# Altium PCB PCB1.PcbDoc (part 2 of 2)
Units mm, origin at the board's own origin, x right, y up, seen from the top; angles counter-clockwise.
Board outline 100 x 24 mm, 2 copper layers (Top Layer, Bottom Layer); 70 components, 86 nets, 352 pads, 196 vias.
Unrouted connection lines stored in the file: 3.
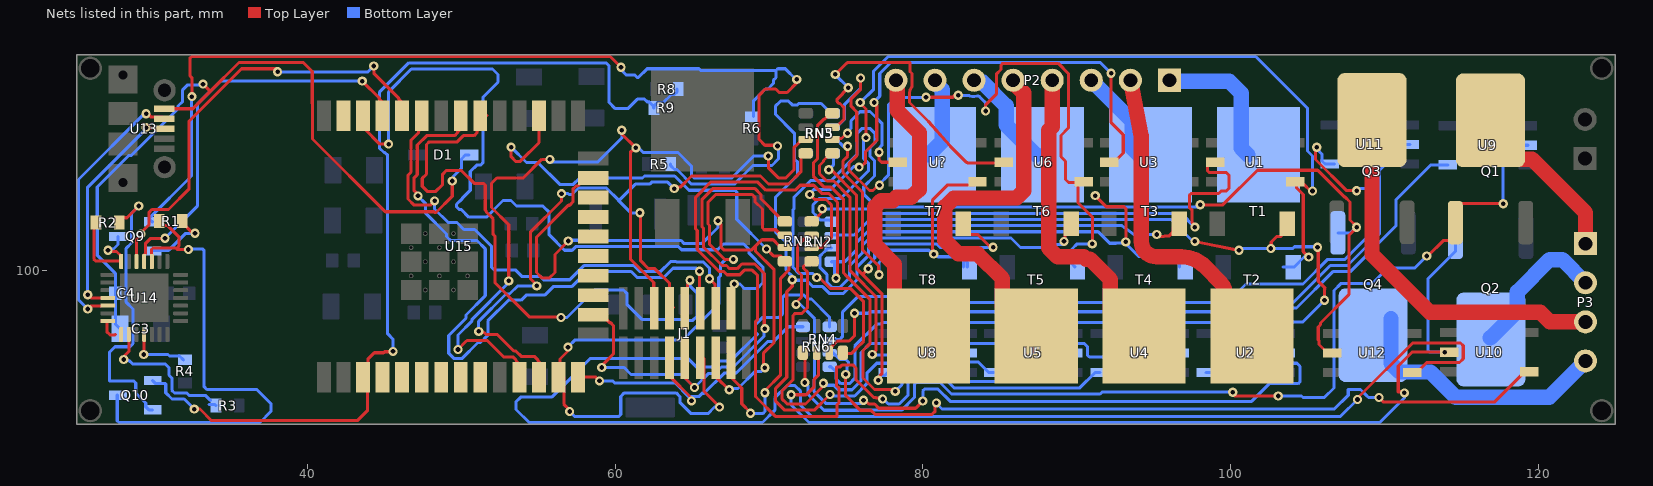
[diagram p2: the nets of this part, all layers, seen from the top]

## Via types
v1: diameter 0.6, hole 0.3, Top Layer to Bottom Layer, 196 vias

## Nets (pads, with @x,y where several pads share a name; then routed paths per layer and width w, separated by ;. In a path a pad name is that pad's centre, name@x,y a point inside that pad or via, vN(x,y) a via of type N, cw(c..) or ccw(c..) an arc to the next point about the centre after c; other vN are vias at no path point) (continued)
NetJ1_06: J1.06 RN3.3 U15.11 | length 57.4
  Top Layer w0.2: v1(49.775,94.85) 50.32,95.395 50.338,95.395 50.367,95.425 51.691,95.425 52.766,94.35 53.369,94.35 53.545,94.174 53.545,94.12 53.915,93.75 U15.11@53.915,92.973 ; v1(53.078,99.305) 53.078,102.957 51.95,104.084 51.95,105.649 52.301,106 54.021,106 55.226,107.205 v1(55.753,107.205) ; v1(60.425,109.1) 60.425,108.86 v1@61.33,107.955 ; v1(61.343,107.955) 61.295,107.955 61.066,107.727 61.003,107.727 61.003,100.694 62.5,99.197 62.5,97.55 J1.06@62.525,97.525 ; v1(69.95,107.425) 69.95,106.66 70.605,106.005 71.102,106.005 71.61,106.513 71.61,107.965 71.885,108.24 71.893,108.24 72.153,108.5 RN3.3@72.375,108.5
  Bottom Layer w0.2: v1(49.775,94.85) 49.775,95.795 50.7,96.72 50.7,96.823 53.078,99.2 v1(53.078,99.305) ; v1(55.753,107.205) 55.753,107.161 55.838,107.075 55.888,107.025 58.85,107.025 60.425,108.6 v1(60.425,109.1) ; v1(61.343,107.955) 61.511,107.955 61.816,107.65 64.074,107.65 64.95,106.774 64.95,106.176 65.126,106 67.574,106 68.999,107.425 v1(69.95,107.425)
NetJ1_07: J1.07 RN6.4 U15.14 | length 20.1
  Top Layer w0.2: 58.025,93.05 58.732,93.05 v1(58.978,92.805) ; J1.07@63.55,94.483 63.55,93.1 64.953,91.697 v1(64.953,91.504)
  Bottom Layer w0.2: v1(58.978,92.805) 59.836,92.805 59.966,92.675 63.882,92.675 64.778,91.78 65.43,91.78 65.653,92.003 65.769,92.003 67.075,93.309 67.848,93.309 69.893,95.355 70.277,95.355 71.247,96.325 RN6.4@72.2,96.325
NetJ1_08: J1.08 RN3.4 U15.12 | length 46.6
  Top Layer w0.2: v1(51.118,96.025) 51.194,95.949 51.477,95.949 51.601,95.825 52.334,95.825 53.409,94.75 53.535,94.75 53.885,94.4 54.739,94.4 54.965,94.174 54.965,94.12 55.26,93.825 U15.12@55.26,93.002 ; v1(54.903,98.98) 54.903,99.041 54.478,99.466 54.478,102.478 56.503,104.503 v1(56.503,104.98) ; v1(61.603,103.73) 61.65,103.683 61.65,100.613 62.158,100.105 62.577,100.105 63.525,99.157 J1.08@63.525,97.525 ; J1.08@63.655,97.692 J1.08@63.775,97.572 ; v1(63.828,105.305) 63.828,105.39 63.818,105.4 64.228,105.4 64.953,106.125 69.437,106.125 69.956,105.605 71.268,105.605 72.065,106.402 72.065,107.365 72.3,107.6 RN3.4@72.375,107.6
  Bottom Layer w0.2: v1(51.118,96.025) 51.118,96.675 52.898,98.455 53.13,98.455 53.655,98.98 v1(54.903,98.98) ; v1(56.503,104.98) 56.932,104.98 56.987,104.925 57.187,104.925 57.612,105.35 59.415,105.35 60.225,104.54 60.225,104.516 ; v1(61.603,103.73) 61.011,103.73 60.225,104.516 ; v1(63.828,105.305) 63.403,105.73 62.367,105.73 62.237,105.6 61.309,105.6 60.225,104.516
NetJ1_09: J1.09 RN1.1 U15.16 | length 37.8
  Top Layer w0.2: U15.16@59.025,97.105 59.125,97.105 59.645,96.585 59.699,96.585 59.875,96.409 59.875,94.55 59.287,93.962 59.287,93.945 59.125,93.783 v1(59.125,93.675) ; J1.09@64.375,94.374 64.375,93.158 v1(65.153,92.38) ; v1(69.728,96.205) 69.683,96.25 69.683,99.789 69.068,100.405 68.227,100.405 67.927,100.105 67.43,100.105 67.23,100.305 66.939,100.305 65.728,101.516 65.728,102.744 65.625,102.847 65.625,104.589 66.361,105.325 69.065,105.325 69.475,104.915 69.475,104.638 70.66,103.453 70.851,103.262 RN1.1@71.025,103.262
  Bottom Layer w0.2: v1(59.125,93.675) 60.575,93.675 61.025,93.225 64.308,93.225 v1(65.153,92.38) 66.074,93.3 66.5,93.3 66.909,93.709 67.682,93.709 69.662,95.688 69.662,96.138 v1(69.728,96.205)
NetJ1_10: J1.10 U15.30 | length 40.4
  Top Layer w0.2: 51.584,103.808 51.597,103.808 52.065,103.34 52.065,102.336 52.175,102.226 52.175,99.206 54.431,96.95 56.45,96.95 v1(56.475,96.925) ; 51.584,103.884 51.55,103.918 51.55,105.533 51.433,105.65 50.825,105.65 50,106.475 49,106.475 48.775,106.25 48.775,105.579 48.301,105.105 47.804,105.105 47.452,105.457 47.452,105.972 47.725,106.245 47.725,108.175 47.9,108.35 49.725,108.35 50.125,108.75 50.829,108.75 51.005,108.926 51.005,109.033 51.275,109.303 51.275,109.75 51.575,110.05 51.675,110.05 ; J1.10@64.575,97.797 64.699,97.921 64.699,99.091 64.85,99.242 v1(64.85,99.35)
  Bottom Layer w0.2: v1(56.475,96.925) 56.858,96.925 58.653,98.72 60.533,98.72 60.75,98.503 60.75,97.787 61.727,96.81 64.29,96.81 64.356,96.744 65.047,96.744 65.33,97.027 65.33,98.503 64.85,98.983 v1(64.85,99.35)
NetJ1_11: J1.11 RN1.2 U15.13 | length 47.1
  Top Layer w0.2: U15.13@56.305,93.05 56.408,93.153 56.408,94.233 56.925,94.75 v1(56.925,95.005) ; U15.13@56.5,93.153 56.655,92.998 56.655,91.291 57.031,90.915 v1(57.031,90.819) ; J1.11@65.725,94.282 65.778,94.229 65.778,92.122 66.778,91.122 v1(66.778,91.104) ; v1(67.678,100.705) 67.105,100.705 66.128,101.682 66.128,102.91 66.025,103.013 66.025,104.424 66.526,104.925 68.899,104.925 69.075,104.749 69.075,104.473 69.57,103.978 69.57,102.747 69.687,102.63 70.434,102.63 70.789,102.275 RN1.2@71.025,102.275
  Bottom Layer w0.2: v1(56.925,95.005) 57.395,95.475 64.4,95.475 65.35,96.425 65.35,96.474 65.526,96.65 65.575,96.65 66.728,97.803 66.728,99.519 66.833,99.624 66.833,100.358 67.18,100.705 v1(67.678,100.705) ; v1(57.031,90.819) 57.35,90.5 60.238,90.5 60.355,90.617 60.355,91.797 60.588,92.03 63.962,92.03 64.195,91.797 64.195,91.414 64.933,90.676 66.024,90.676 66.452,91.104 v1(66.778,91.104)
NetJ1_12: J1.12 U15.31 | length 44.2
  Top Layer w0.2: v1(47.177,104.83) 47.223,104.83 47.243,104.85 46.927,105.166 46.927,106.013 47.125,106.211 47.125,108.141 47.734,108.75 49.559,108.75 49.735,108.926 49.735,108.98 50.105,109.35 U15.31@50.105,110.017 ; J1.12@65.435,97.948 J1.12@65.435,98.09 ; v1(65.478,99.93) 65.475,99.927 65.475,98.09 65.475,97.575 J1.12@65.525,97.525
  Bottom Layer w0.2: v1(47.177,104.83) 47.65,104.357 47.65,103.734 49.032,102.351 49.032,102.199 49.296,101.935 51.009,101.935 51.55,101.394 51.55,98.346 50.3,97.096 50.3,96.886 49.175,95.761 49.175,94.601 49.526,94.25 50.024,94.25 51.074,95.3 51.241,95.3 51.718,95.777 51.718,96.709 53.063,98.055 53.879,98.055 54.204,98.38 55.41,98.38 55.96,98.93 57.166,98.93 58.156,99.92 61.03,99.92 61.421,99.53 63.155,99.53 63.755,100.13 65.278,100.13 v1(65.478,99.93)
NetJ1_13: J1.13 RN1.3 U15.23 | length 43.2
  Top Layer w0.2: v1(56.95,101.9) 56.078,101.028 56.078,99.856 55.726,99.505 55.229,99.505 54.878,99.856 54.878,102.151 56.951,104.225 57.033,104.225 57.242,104.434 57.242,105.266 57.451,105.475 57.558,105.475 57.675,105.592 57.675,105.645 U15.23@58.675,105.645 ; J1.13@66.575,94.27 66.575,93.053 67.396,92.232 v1(67.412,92.232) ; v1(66.675,103.212) 66.675,103.2 66.875,103 66.875,101.501 67.051,101.325 68.878,101.325 69.103,101.55 ; v1(69.728,93.668) 69.625,93.771 69.625,94.596 70.328,95.3 70.328,100.031 69.103,101.256 69.103,101.55 ; RN1.3@71.025,101.475 70.897,101.603 70.638,101.603 70.261,101.98 69.533,101.98 69.103,101.55
  Bottom Layer w0.2: v1(56.95,101.9) 57,101.95 57.934,101.95 57.954,101.93 64.28,101.93 64.48,101.73 65.629,101.73 66.675,102.776 v1(66.675,103.212) ; v1(67.412,92.232) 67.493,92.313 67.983,92.313 69.1,93.429 69.49,93.429 v1(69.728,93.668)
NetJ1_14: J1.14 U15.33 | length 32.7
  Top Layer w0.2: U15.33@47.715,110.05 47.715,109.5 47.365,109.15 47.312,109.15 47.195,109.033 47.195,108.926 46.725,108.456 46.725,106.376 46.527,106.179 46.527,104.632 46.929,104.23 47.977,104.23 v1(48.252,104.505) ; v1(66.128,99.449) 66.475,99.102 J1.14@66.475,97.653
  Bottom Layer w0.2: v1(48.252,104.505) 48.252,103.985 48.25,103.982 49.135,103.098 49.706,103.098 50.154,102.65 50.859,102.65 51.95,101.559 51.95,100.192 52.117,100.025 53.5,100.025 53.945,99.58 55.151,99.58 55.351,99.38 57.05,99.38 57.991,100.32 61.196,100.32 61.586,99.93 62.967,99.93 63.553,100.516 63.609,100.572 63.941,100.572 63.983,100.53 65.727,100.53 66.128,100.128 v1(66.128,99.449)
NetJ1_15: J1.15 RN1.4 U15.27 | length 42.8
  Top Layer w0.2: v1(53.228,108.005) 53.228,107.372 53.517,107.083 53.831,107.083 55.043,108.294 55.043,109.608 U15.27@55.242,109.808 ; J1.15@67.575,94.423 67.575,93 68.225,92.35 68.225,91.319 68.795,90.749 v1(68.795,90.7) ; v1(69.728,92.029) 69.728,92.184 70.75,93.206 70.75,99.475 71.3,100.025 71.3,100.371 70.736,100.935 70.273,100.935 v1(69.828,101.38)
  Bottom Layer w0.2: v1(53.228,108.005) 54.233,107 54.965,107 56.385,105.58 57.276,105.58 57.696,106 61.766,106 61.896,106.13 63.864,106.13 64.794,105.2 67.783,105.2 67.9,105.083 67.9,103.308 v1(69.828,101.38) ; v1(68.795,90.7) 69.611,90.7 69.728,90.817 v1(69.728,92.029)
NetJ1_16: J1.16 U15.36 | length 52.6
  Top Layer w0.2: U15.36@43.675,109.976 43.675,109.217 44.692,108.2 v1(45.264,108.2) ; J1.16@67.55,97.544 67.652,97.646 67.652,99.028 v1(67.728,99.105)
  Bottom Layer w0.2: v1(45.264,108.2) 45.264,111.6 46.745,113.08 52.015,113.08 52.372,112.724 52.372,112.226 51.41,111.264 51.41,107.011 51.234,106.835 50.986,106.835 50.575,106.424 50.575,105.2 50.05,104.675 50.05,104.65 49.683,104.283 49.683,104.118 49.851,103.95 49.985,103.95 50.485,103.45 51.624,103.45 52.704,104.53 53.221,104.53 53.576,104.175 55.29,104.175 55.7,103.765 55.7,102.302 56.701,101.3 57.199,101.3 57.428,101.53 64.114,101.53 64.314,101.33 66.649,101.33 67.023,101.705 68.343,101.705 68.7,101.347 68.7,101.094 69.598,100.196 69.598,99.201 69.202,98.805 68.405,98.805 68.105,99.105 v1(67.728,99.105)
NetP2_1: P2.1 T1.4 | length 9.2
  Bottom Layer w1: P2.1@96.025,112.35 96.1,112.275 99.925,112.275 100.686,111.514 100.686,107.944 T1.4@101.13,107.5
NetP2_2: P2.2 T2.4 | length 22.6
  Top Layer w1: P2.2@93.485,112.35 94.181,108.783 94.181,108.78 cw(c93.199,108.594) 94.191,108.716 ; 94.191,108.716 94.192,108.71 cw(c93.2,108.585) 94.2,108.585 94.2,101.875 ccw(c95.2,101.875) 95.2,100.875 96.78,100.875 cw(c96.78,98.675) 98.102,100.434 98.218,100.346 cw(c97.08,98.825) 98.457,100.134 99.348,99.198 cw(c98.625,98.508) 99.625,98.512 99.625,98.511 99.625,95.525 T2.4@101.05,94.1
NetP2_3: P2.3 T3.4 | length 6.1
  Bottom Layer w1: P2.3@90.945,112.35 93.6,109.695 93.6,107.933 T3.4@94.033,107.5
NetP2_4: P2.4 T4.4 | length 20.5
  Top Layer w1: P2.4@88.405,112.35 88.405,109.326 88.175,109.096 88.175,101.461 88.761,100.875 90.466,100.875 90.616,100.725 90.854,100.725 92.18,99.399 92.18,97.278 T4.4@93.983,95.475
NetP2_5: P2.5 T5.4 | length 24.4
  Top Layer w1: P2.5@85.865,112.35 85.865,112.215 86.55,111.53 86.55,105.16 86.09,104.7 82.015,104.7 81.43,104.115 81.43,101.935 82.304,101.061 83.561,101.061 85.167,99.455 85.167,97.675 T5.4@87.067,95.775
NetP2_6: P2.6 T6.4 | length 6.8
  Bottom Layer w1: P2.6@83.325,112.35 83.421,112.254 83.846,112.254 85.417,110.683 85.417,109.45 T6.4@87.367,107.5
NetP2_7: P2.7 T7.4 | length 5.4
  Bottom Layer w1: T7.4@80.35,107.5 81.267,108.417 81.267,111.733 80.785,112.215 P2.7@80.785,112.35
NetP2_8: P2.8 T8.4 | length 21
  Top Layer w1: P2.8@78.245,112.35 78.325,112.27 78.325,110.387 79.775,108.937 79.775,105.225 79.715,105.225 79.24,104.75 78.275,104.75 78.05,104.525 77.28,104.525 76.87,104.115 76.87,101.66 78.15,100.38 78.15,97.225 T8.4@79.9,95.475
NetP3_1: P3.1 Q1.3 | length 11.2
  Top Layer w1: Q1.3@116.9,109.775 116.9,108.97 118.645,107.225 119.597,107.225 123.075,103.747 P3.1@123.075,101.725
NetP3_2: P3.2 Q2.3 | length 9.6
  Bottom Layer w1: Q2.3@116.89,95.6 118.645,97.355 118.645,98.595 120.741,100.691 121.569,100.691 P3.2@123.075,99.185
NetP3_3: P3.3 Q3.3 | length 24.4
  Top Layer w1: Q3.3@109.194,109.762 109.194,101.019 112.937,97.275 120.126,97.275 120.756,96.645 P3.3@123.075,96.645
NetP3_4: P3.4 Q4.3 | length 17.4
  Bottom Layer w1: Q4.3@110.434,96.841 110.434,93.944 110.995,93.383 112.995,93.383 114.628,91.75 120.72,91.75 P3.4@123.075,94.105
NetQ1_1: Q1.1 RN4.1 U9.5 | length 64.8
  Top Layer w0.2: RN4.1@72.325,94.685 72.325,92.708 v1(72.329,92.705) ; v1(100.15,92.075) 100.15,91.942 100.267,91.825 v1(103.1,91.825) ; v1(112.75,100.925) 112.825,100.925 113.825,101.925 114.236,101.925 114.61,102.299 114.61,103.125 114.61,103.978 114.957,104.325 v1(117.725,104.325)
  Bottom Layer w0.2: v1(72.329,92.705) 72.529,92.504 72.529,91.939 73.567,90.9 75.8,90.9 ; 75.8,90.904 78.618,90.904 79.44,91.726 79.44,92.583 79.557,92.7 81.115,92.7 81.859,91.955 83.12,91.955 91.521,91.955 91.641,92.075 v1(100.15,92.075) ; v1(103.1,91.825) 104.604,91.825 104.704,91.725 106.1,91.725 106.72,92.345 106.72,98.686 107.159,99.125 109.2,99.125 110.225,100.15 111.975,100.15 v1(112.75,100.925) ; v1(117.725,104.325) 117.725,106.825 119.025,108.125 U9.5@119.325,108.125
NetQ2_1: Q2.1 RN4.2 U10.5 | length 61
  Top Layer w0.2: v1(71.428,91.904) 72.348,91.904 72.373,91.879 72.929,92.435 72.929,92.903 73.225,93.199 RN4.2@73.225,94.51 ; v1(111.3,92.025) 111.225,92.1 110.9,92.1 110.9,93.774 111.801,94.675 v1(113.925,94.675) U10.5@114.225,94.675
  Bottom Layer w0.2: v1(71.428,91.904) 71.428,91.265 72.594,90.1 73.013,90.1 73.922,90.1 74.725,90.1 105.941,90.1 109.7,90.1 111.3,91.7 v1(111.3,92.025) ; v1(113.925,94.675) 112.942,94.675 112.825,94.792 112.825,99.435 114.61,101.22 Q2.1@114.61,102.15
NetQ3_3: RN4.3 U11.5 | length 46.4
  Top Layer w0.2: RN4.3@74.084,94.967 74.084,95.049 74.435,95.4 75.205,95.4 75.565,95.76 75.565,97.187 v1(75.55,97.202)
  Bottom Layer w0.2: v1(75.55,97.202) 76.452,97.202 76.55,97.3 101.599,97.3 102.244,97.945 104.12,97.945 106.485,100.31 107.608,100.31 109.691,102.394 109.691,106.517 111.35,108.175 U11.5@111.65,108.175
NetQ4_1: Q4.1 RN4.4 U12.5 | length 73.6
  Top Layer w0.2: v1(73.104,99.53) 73.256,99.53 73.961,98.825 75.275,98.825 76.15,97.95 76.15,95.39 75.704,94.944 75.704,94.938 75.366,94.6 75.015,94.6 RN4.4@74.925,94.51 ; v1(98.025,104.25) 99.5,104.25 101.75,106.5 105.659,106.5 107.384,104.775 107.423,104.775 107.76,104.439 107.76,103.265 108.142,102.883 108.142,102.852 v1(108.194,102.8) ; U12.5@106.6,94.62 106.3,94.62 105.75,95.17 105.75,95.416 105.7,95.466 105.7,96.314 105.85,96.464 105.85,96.575 107.689,98.414 107.689,102.264 v1@108.209,102.784
  Bottom Layer w0.2: v1(73.104,99.53) 72.854,99.78 71.965,99.78 71.56,100.185 71.56,103.936 71.629,104.005 71.629,104.757 72.696,105.825 74.022,105.825 75.704,107.507 75.704,108.373 75.7,108.376 75.7,108.874 76.051,109.225 76.549,109.225 76.9,108.874 76.9,108.3 76.55,107.95 76.55,107.423 76.854,107.119 76.854,106.129 76.154,105.429 76.154,104.932 76.985,104.1 97.875,104.1 v1(98.025,104.25) ; Q4.1@106.975,102.425 107.76,102.425 108.135,102.8 v1(108.194,102.8)
NetQ9_1: Q9.1 R5.1 R6.2 | length 73.1
  Top Layer w0.2: v1(32.475,111.289) 32.475,112.524 32.342,112.657 32.342,113.783 32.459,113.9 59.675,113.9 v1(60.375,113.2) ; v1(70.55,108.077) 70.5,108.127 69.725,108.127 69.353,108.498 69.353,111.379 69.755,111.78 70.427,111.78 70.657,111.55 71.174,111.55 71.804,112.18 v1(71.804,112.405)
  Bottom Layer w0.2: Q9.1@29.925,103.15 29.875,103.15 29.675,103.35 32.45,106.125 32.45,111.125 32.475,111.15 v1(32.475,111.289) ; v1(60.375,113.2) 60.375,113.092 60.512,112.955 60.512,112.888 60.7,112.7 61.25,112.7 61.425,112.525 61.499,112.525 62.074,113.1 65.441,113.1 65.558,112.983 70.45,112.983 ; R5.1@63.6,106.9 63.6,106.8 63.85,106.55 64.01,106.55 64.96,105.6 67.74,105.6 68.953,106.813 70.187,106.813 70.603,107.23 70.603,108.024 v1(70.55,108.077) ; R6.2@69,110 69,111.026 69.757,111.783 69.924,111.783 70.275,112.134 70.275,112.349 70.45,112.524 70.45,112.983 ; v1(71.804,112.405) 71.754,112.405 71.059,113.1 70.567,113.1 70.45,112.983
NetQ9_2: Q9.2 R1.2 | length 4.4
  Top Layer w0.2: R1.2@31.85,103.2 31.85,103.1 32.473,102.477 32.598,102.477 v1(32.675,102.4)
  Bottom Layer w0.2: Q9.2@29.925,101.25 29.975,101.3 30.963,101.3 32.038,102.375 32.65,102.375 v1(32.675,102.4)
NetQ9_3: Q9.3 R2.1 U14.28 | length 7
  Top Layer w0.2: R2.1@26.25,103.1 26.1,102.95 26.1,100.717 26.217,100.6 27.845,100.6 U14.28@27.875,100.57 27.875,100.925 27.577,101.223 27.102,101.223 v1(27.025,101.3)
  Bottom Layer w0.2: v1(27.025,101.3) 27.102,101.377 27.377,101.377 27.675,101.675 Q9.3@27.675,102.2
NetQ10_1: Q10.1 R8.1 R9.2 U15.3 | length 62
  Top Layer w0.2: v1(32.625,90.975) 33,90.975 33.75,90.225 43.234,90.225 43.905,90.896 U15.3@43.905,93.05 ; U15.3@43.605,93.05 43.915,93.36 43.915,94.215 44.337,94.637 44.942,94.637 45.004,94.699 45.524,94.699 v1(45.55,94.725)
  Bottom Layer w0.2: Q10.1@29.925,92.825 30.125,92.625 30.75,92.625 30.775,92.6 30.775,92.035 31.185,91.625 31.975,91.625 v1(32.625,90.975) ; v1(45.55,94.725) 45.55,95.52 45.2,95.87 45.2,107.474 45.024,107.65 44.966,107.65 44.664,107.951 44.664,111.566 46.579,113.48 59.394,113.48 59.6,113.274 59.6,110.91 60.004,110.505 60.821,110.505 61.437,111.121 61.899,111.121 62.07,110.95 62.169,110.95 62.185,110.965 62.5,110.65 R9.2@62.5,110.55 ; R9.2@62.569,110.719 62.75,110.9 63.125,110.9 63.65,111.425 63.85,111.425 64,111.575 R8.1@64,111.775
NetQ10_2: Q10.2 R2.2 | length 19
  Top Layer w0.2: R2.2@27.75,103.1 27.75,103.162 28,103.412 28.262,103.412 v1(29.025,104.175)
  Bottom Layer w0.2: v1(29.025,104.175) 28.55,103.7 28.55,101.776 28.2,101.426 28.2,97.926 28.65,97.476 28.65,95.226 28.449,95.025 27.476,95.025 27.125,94.674 27.125,92.801 28.049,92.801 28.699,92.801 28.825,92.675 28.825,92.025 29.475,91.375 29.475,91.125 29.675,90.925 Q10.2@29.925,90.925
NetQ10_3: Q10.3 R1.1 U14.24 | length 32.5
  Top Layer w0.2: U14.24@29.85,101.05 29.85,101.355 29.945,101.45 31.508,101.45 31.625,101.567 31.625,102.175 30.883,102.917 30.6,102.917 30.35,103.167 R1.1@30.35,103.2 ; 31.508,101.355 32.22,101.355 32.225,101.35 v1(32.25,101.35)
  Bottom Layer w0.2: Q10.3@27.625,91.9 27.625,90.217 27.742,90.1 36.899,90.1 37.625,90.826 37.625,91.324 36.699,92.25 33.451,92.25 33.275,92.426 33.275,101.275 33.158,101.392 32.292,101.392 v1(32.25,101.35)
NetR3_1: R3.1 U14.9 | length 9.7
  Top Layer w0.2: v1(28.05,94.2) 28.05,94.392 28.375,94.717 U14.9@28.375,95.83
  Bottom Layer w0.2: v1(28.05,94.2) 28.127,94.123 28.401,94.123 28.624,93.9 30.75,93.9 30.988,93.662 30.988,93.178 31.175,92.991 31.175,92.201 31.351,92.025 32.141,92.025 32.316,91.85 33.375,91.85 33.675,91.55 ; 33.6,91.275 33.975,91.275 R3.1@34.05,91.2
NetR4_2: R4.2 U14.11 | length 4
  Top Layer w0.2: v1(29.35,94.525) 29.375,94.55 U14.11@29.375,95.83
  Bottom Layer w0.2: v1(29.35,94.525) 30.916,94.525 31.016,94.425 31.675,94.425 R4.2@31.925,94.175
NetRN1_5: RN1.5 U4.5 | length 40
  Top Layer w0.2: RN1.5@72.765,100.575 72.602,100.575 72.402,100.375 72.367,100.375 72.25,100.258 72.25,100.114 72.503,99.861 72.503,97.578 72.105,97.18 71.667,97.18 71.55,97.063 71.55,92.875 70.828,92.153 70.828,91.656 71.18,91.304 72.364,91.304 73.529,92.469 v1(73.529,92.655)
  Bottom Layer w0.2: v1(73.529,92.655) 73.658,92.525 74.205,92.525 74.5,92.23 75.393,92.23 75.979,92.815 75.979,94.653 76.551,95.225 83.639,95.225 90.499,95.225 90.7,95.024 90.7,94.475 90.82,94.355 U4.5@96.52,94.355
NetRN1_6: RN1.6 U3.5 | length 38.4
  Top Layer w0.2: v1(72.645,104.925) 72.967,104.602 73.699,104.602 74.051,104.251 74.051,102.117 73.425,101.491 72.816,101.491 RN1.6@72.8,101.475 ; v1@75.929,106.78 76.043,106.78 76.257,106.993 76.257,107.682 77.017,108.442 77.017,108.608 77,108.625 77,110.734 v1(76.829,110.905) ; U3.5@92.125,107.02 92.425,107.02 93.025,107.62 93.025,108.806 92.235,109.597 v1(92.235,112.805) v1@92.23,112.8
  Bottom Layer w0.2: v1(72.645,104.925) 72.645,104.966 72.934,105.255 74.018,105.255 75.52,106.757 75.802,106.757 v1(75.854,106.705) ; v1(76.829,110.905) 76.829,110.954 77.195,111.32 77.195,112.785 77.91,113.5 91.53,113.5 92.225,112.805 v1(92.235,112.805)
NetRN1_7: RN1.7 U2.5 | length 48.2
  Top Layer w0.2: v1(71.754,97.78) 71.754,97.895 71.75,97.899 72.103,98.252 72.103,99.695 71.85,99.949 71.85,101.619 72.246,102.015 72.269,102.015 72.429,102.175 RN1.7@72.675,102.175 ; v1(76.14,91.541) 76.248,91.541 76.489,91.3 76.86,91.3 77.13,91.029 79.525,91.029 v1(79.996,91.5)
  Bottom Layer w0.2: v1(71.754,97.78) 71.788,97.78 71.907,97.898 72.965,96.84 72.965,92.939 72.929,92.903 72.929,92.104 73.708,91.325 75.924,91.325 v1(76.14,91.541) ; v1(79.996,91.5) 79.996,92.158 80.113,92.275 80.974,92.275 81.774,91.475 101.375,91.475 102.525,92.625 104.398,92.625 104.515,92.742 104.515,93.754 104.314,93.955 103.707,93.955 103.59,94.072 U2.5@103.59,94.625
NetRN1_8: RN1.8 U1.5 | length 33.5
  Top Layer w0.2: RN1.8@72.879,103.201 72.88,103.201 73.374,103.695 73.374,103.926 v1(73.451,104.002) ; v1(97.68,102.805) 97.68,102.913 97.501,103.092 97.501,103.908 97.325,104.084 97.325,104.868 97.442,104.985 99.224,104.985 99.389,105.15 99.724,105.15 99.9,105.326 99.9,106.174 99.724,106.35 98.617,106.35 98.5,106.467 U1.5@98.5,106.855
  Bottom Layer w0.2: v1(73.451,104.002) 73.478,103.975 76.519,103.975 76.794,103.7 96.785,103.7 v1(97.68,102.805)
NetRN2_1: RN2.1 T1.1 U1.1 | length 57.8
  Top Layer w0.2: v1(75.932,110.905) 75.932,110.851 76.3,110.482 v1(76.3,108.625) ; U1.1@104.2,105.75 104.2,105.585 104.765,105.585 105.2,105.15 v1(105.325,105.15) ; U1.1@104.24,105.585 104.275,105.55 104.275,105.375 104.725,104.925 104.725,101.21 v1(105.08,100.855)
  Bottom Layer w0.2: RN2.1@74.065,103.15 73.94,103.275 73.3,103.275 73.1,103.475 73.1,103.505 72.851,103.754 72.851,104.251 73.25,104.65 74.647,104.65 76.454,106.457 76.454,106.954 76.15,107.257 76.15,108.475 v1(76.3,108.625) 76.3,108.668 v1@76.329,108.697 ; v1(75.932,110.905) 76.795,111.769 76.795,112.951 77.744,113.9 100.954,113.9 101.629,113.9 105,110.529 105,107.751 105.325,107.426 v1(105.325,105.15) ; 103.41,100.2 104.125,100.2 104.78,100.855 v1(105.08,100.855)
NetRN2_2: RN2.2 T2.1 U2.1 | length 48.1
  Top Layer w0.2: v1(97.68,101.875) 100.475,101.3 v1(100.55,101.3) ; v1(102.625,101.411) 102.647,101.433 102.647,101.837 103.002,102.192 103.285,102.192 103.685,102.592 T2.1@103.685,102.775 ; v1(105.65,101.5) 105.7,101.45 105.7,99.286 106.15,98.835 106.105,98.791 v1(106.105,98.055)
  Bottom Layer w0.2: RN2.2@74.182,102.292 75.527,102.292 76.534,103.3 76.625,103.3 96.125,103.3 v1@97.496,101.929 ; v1@97.497,101.928 ccw(c97.637,102.07) v1(97.68,101.875) ; U2.1@98.39,93.355 98.395,93.35 99.26,93.35 100.3,94.39 100.3,94.69 102.235,96.625 104.675,96.625 v1(106.105,98.055) ; v1(100.55,101.3) 100.661,101.411 v1(102.625,101.411) 104.042,101.411 104.156,101.525 105.625,101.525 v1(105.65,101.5)
NetRN2_3: RN2.3 T3.1 | length 33.9
  Top Layer w0.2: v1(91.2,104.85) 91.925,104.125 93.077,104.125 93.194,104.008 v1(93.194,101.844)
  Bottom Layer w0.2: RN2.3@74.065,101.45 73.843,101.45 73.583,101.19 73.575,101.19 73.3,100.915 73.3,100.185 73.754,99.732 73.754,99.226 74.105,98.875 74.602,98.875 75.23,99.503 75.23,100.294 76.07,101.134 76.07,101.621 76.949,102.5 91.391,102.5 92.136,101.755 92.566,101.755 92.594,101.783 93.132,101.783 v1(93.194,101.844) ; v1@93.165,101.755 94.02,100.9 95.988,100.9 96.231,100.658 96.513,100.658 96.676,100.496 T3.1@96.676,100.213
NetRN2_4: RN2.4 T4.1 U4.1 | length 86.5
  Top Layer w0.2: v1(74.354,99.475) 74.354,99.477 74.451,99.575 74.451,104.417 73.865,105.002 73.416,105.002 72.893,105.525 72.028,105.525 71.708,105.205 69.791,105.205 69.271,105.725 66.195,105.725 65.225,104.755 65.225,102.682 65.328,102.579 65.328,101.351 66.774,99.905 67.064,99.905 67.264,99.705 68.093,99.705 68.392,100.005 68.902,100.005 69.253,99.653 69.253,96.802 69.128,96.677 69.128,91.781 69.209,91.7 70.409,90.5 74.425,90.5 74.425,91.271 74.556,91.402 74.556,92.32 74.375,92.501 74.375,93.7 74.601,93.7 74.73,93.83 75.47,93.83 75.65,93.65 75.65,92.879 76.804,91.725 76.95,91.725 76.969,91.706 77.302,91.706 v1(77.379,91.629) ; v1@95.439,102.195 95.683,102.195 95.706,102.217 95.988,102.217 96.263,102.492 T4.1@96.263,102.775
  Bottom Layer w0.2: RN2.4@74.065,100.55 RN2.4@74.244,100.55 ; v1(74.354,99.475) 74.354,99.548 74.244,99.658 RN2.4@74.244,100.55 ; v1(77.379,91.629) 77.379,91.68 77.754,91.304 78.452,91.304 79.04,91.892 79.04,92.254 79.04,92.749 79.391,93.1 81.28,93.1 82.025,92.355 83.286,92.355 90.195,92.355 91.195,93.355 U4.1@91.495,93.355 ; v1(95.2,102.325) 93.688,102.325 92.937,102.9 76.783,102.9 75.67,101.787 75.67,101.308 74.912,100.55 RN2.4@74.244,100.55
NetRN3_5: RN3.5 U8.5 | length 21.7
  Top Layer w0.2: RN3.5@74.115,107.6 74.001,107.6 73.54,107.139 73.54,107.07 73.279,106.808 73.279,106.282 73.758,105.802 74.196,105.802 75.251,104.748 75.251,99.992 75.434,99.808 75.434,99.797 76.95,98.281 76.95,94.776 v1(76.704,94.53)
  Bottom Layer w0.2: v1(76.704,94.53) 76.747,94.486 82.776,94.486 U8.5@82.915,94.625
NetRN3_6: RN3.6 U?.5 | length 8.3
  Top Layer w0.2: RN3.6@74.115,108.5 74.177,108.562 74.709,108.562 75.055,108.908 v1(75.1,108.908) ; v1(77.15,107.673) 77.15,107.179 77.309,107.02 U?.5@78.35,107.02
  Bottom Layer w0.2: v1(75.1,108.908) 75.1,108.991 75.2,109.091 75.32,109.211 75.32,109.71 75.915,110.305 76.216,110.305 76.233,110.322 76.564,110.322 77.329,109.557 77.329,108.121 77.175,107.967 77.175,107.875 77.175,107.698 v1(77.15,107.673)
NetRN3_7: RN3.7 U6.5 | length 19.9
  Top Layer w0.2: RN3.7@74.115,109.3 74.345,109.3 74.88,109.835 74.88,110.565 74.605,110.84 74.538,110.84 74.421,110.957 74.421,111.123 v1@75.154,111.855 ; v1(74.304,112.731) 75.015,113.441 cw(c75.156,113.3) 75.156,113.5 79.154,113.5 79.154,112.925 79.295,112.785 79.295,111.998 ; 79.295,111.997 cw(c79.095,111.999) 79.265,111.894 79.214,111.811 ccw(c79.725,111.497) 79.125,111.497 79.125,110.906 80.331,109.7 cw(c80.189,109.559) 80.34,109.691 81.759,108.092 ccw(c82.208,108.49) 81.784,108.066 82.821,107.028 ccw(c82.962,107.17) 82.962,106.97 U6.5@84.75,106.97
  Bottom Layer w0.2: v1(74.304,112.731) 74.304,112.718 75.14,111.882 v1(75.14,111.869)
NetRN3_8: RN3.8 U5.5 | length 35.5
  Top Layer w0.2: RN3.8@74.115,110.2 73.993,110.2 73.633,109.84 73.596,109.84 73.14,109.384 73.14,107.235 72.879,106.974 72.879,106.116 73.592,105.402 74.031,105.402 74.851,104.582 74.851,99.826 74.954,99.724 74.954,99.712 76.55,98.116 76.55,95.224 76.104,94.778 76.104,92.991 76.852,92.244 78.085,92.244 v1(78.204,92.125)
  Bottom Layer w0.2: v1(78.204,92.125) 78.64,92.561 78.64,92.914 79.226,93.5 81.446,93.5 82.191,92.755 83.8,92.755 ; 83.801,92.755 87.63,92.755 89.275,94.4 89.275,94.425 89.37,94.521 U5.5@89.645,94.521
NetRN5_1: RN5.1 T5.1 U5.1 | length 63.8
  Top Layer w0.2: v1(71.503,99.38) 71.503,98.95 71.15,98.597 71.15,93.04 70.428,92.319 70.428,91.49 71.014,90.904 72.936,90.904 v1(73.956,91.925) ; v1(89.175,101.875) 89.247,101.947 T5.1@89.247,102.775
  Bottom Layer w0.2: v1(73.956,91.925) 74.052,91.83 75.559,91.83 76.379,92.65 76.379,93.343 76.991,93.955 80.74,93.955 80.795,93.9 82.136,93.9 82.261,94.025 83.61,94.025 83.907,93.728 83.907,93.723 84.275,93.355 U5.1@84.575,93.355 ; RN5.1@74.15,110.2 74.025,110.2 73.385,110.84 71.92,110.84 71.835,110.754 71.503,110.754 71.252,111.005 70.755,111.005 70.403,110.654 70.403,110.157 71.645,108.915 71.645,107.235 71.853,107.027 71.853,106.188 70.425,104.759 70.425,102.475 71.1,101.8 71.1,100.012 71.503,99.608 v1(71.503,99.38) 71.533,99.35 72.435,99.35 72.855,98.93 73.484,98.93 73.939,98.475 74.8,98.475 75.725,99.4 75.725,100.224 76.47,100.969 76.47,101.456 77.114,102.1 85.725,102.1 86.345,101.48 88.454,101.48 88.641,101.667 89.058,101.667 89.175,101.784 v1(89.175,101.875)
NetRN5_2: RN5.2 T6.1 U6.1 | length 49.1
  Top Layer w0.2: v1(75.95,112.5) 75.95,111.772 75.332,111.154 75.332,110.657 75.7,110.289 75.7,108.874 75.7,108.376 75.704,108.373 75.704,107.45 75.2,106.946 75.2,106.51 76.53,105.18 76.754,105.18 77.094,105.52 v1(77.181,105.52) ; v1(80.201,111.245) 81.945,111.245 v1@82.105,111.405 ; v1(84.075,110.35) 84.075,110.75 84.775,111.45 84.775,112.745 85.075,113.045 85.075,113.333 85.192,113.45 88.79,113.45 89.455,112.785 89.455,109.244 88.975,108.764 88.975,107.382 89.275,107.082 89.275,105.9 89.475,105.7 89.95,105.7 90.075,105.575 90.075,104.4 91.013,103.462 v1(91.013,101.712)
  Bottom Layer w0.2: RN5.2@74.15,109.3 74.372,109.3 74.632,109.56 74.64,109.56 74.915,109.835 74.915,110.796 75.95,111.831 v1(75.95,112.5) ; v1(77.181,105.52) 77.181,105.608 77.75,106.176 77.75,110.724 78.256,111.23 80.186,111.23 v1(80.201,111.245) ; v1(82.3,111.375) ccw(c82.396,111.55) 82.396,111.35 82.973,111.35 cw(c82.974,111.15) 83.03,111.342 ccw(c83.325,112.35) 83.525,111.319 cw(c83.563,111.123) 83.705,111.264 83.962,111.007 84.017,110.952 cw(c83.875,110.811) 84.075,110.811 v1(84.075,110.35) ; T6.1@89.897,100.2 89.697,100.4 89.697,101.383 90.026,101.712 v1(91.013,101.712)
NetRN5_3: RN5.3 T7.1 U?.1 | length 27
  Top Layer w0.2: v1(75.104,108.059) 75.104,107.415 74.8,107.112 74.8,106.33 76.07,105.06 76.07,101.328 77.125,100.274 77.125,99.725 v1(77.15,99.7) ; v1(80.7,101.05) 80.63,101.12 80.63,104.576 81.604,105.55 83.35,105.55 U?.1@83.55,105.75
  Bottom Layer w0.2: RN5.3@74.15,108.5 74.38,108.5 74.821,108.059 v1(75.104,108.059) ; v1(77.15,99.7) 77.144,99.706 77.144,100.506 77.329,100.691 77.329,101.183 77.446,101.3 80.383,101.3 80.633,101.05 80.808,101.05 81.008,100.85 T7.1@82.53,100.85 ; 81.008,100.9 81.664,100.9 ; 81.825,100.9 82.48,100.9 82.88,100.5 T7.1@82.88,100.2 ; T7.1@82.63,100.2 T7.1@82.63,100.5
NetRN5_4: RN5.4 T8.1 U8.1 | length 29.9
  Top Layer w0.2: v1(73.879,106.53) 74.034,106.53 75.67,104.894 75.67,100.138 75.834,99.974 75.834,99.963 75.999,99.798 ; v1(76.45,100.1) 76.148,99.798 75.999,99.798 ; v1@77.15,92.944 77.106,92.944 77.05,93 77.35,93.3 77.35,98.447 75.999,99.798 ; T8.1@82.63,102.725 83.03,102.325 83.564,102.325 84.389,101.5 v1(84.564,101.5)
  Bottom Layer w0.2: v1(73.879,106.53) 73.879,106.537 74.175,106.834 74.175,107.575 RN5.4@74.15,107.6 ; v1(76.45,100.1) 76.45,100.378 76.87,100.798 76.87,101.29 77.28,101.7 80.898,101.7 81.119,101.48 84.544,101.48 v1(84.564,101.5) ; v1@77.15,92.944 77.098,92.944 77.05,92.896 77.252,93.098 77.252,93.155 77.515,93.155 U8.1@77.715,93.355
  other v1: 77.1,92.844
NetRN6_5: RN6.5 U12.1 | length 98
  Top Layer w0.2: v1(108.25,91.6) 108.25,91.69 111.835,95.275 114.949,95.275 115.125,95.099 115.125,94.251 114.879,94.005 112.755,94.005 112.1,93.35 U12.1@111.8,93.35
  Bottom Layer w0.2: RN6.5@73.94,96.325 73.918,96.347 73.918,96.965 72.753,98.13 72.524,98.13 72.274,98.38 71.014,98.38 70.88,98.245 70.88,97.18 70.62,96.92 69.555,96.92 69.128,96.494 69.128,95.956 69.241,95.843 69.241,95.834 67.517,94.109 66.744,94.109 66.334,93.7 65.288,93.7 64.713,94.275 58.391,94.275 55.866,91.75 53.851,91.75 53.55,91.449 53.55,90.951 54.401,90.1 69.225,90.1 69.577,90.1 70.378,90.902 70.378,91.703 71.18,92.504 71.677,92.504 72.054,92.128 72.054,91.206 72.759,90.5 107.15,90.5 v1(108.25,91.6)
NetRN6_6: RN6.6 U11.1 | length 49.3
  Top Layer w0.2: v1(105.6,108) 105.525,107.925 105.525,107.2 107.55,105.175 v1(108.194,105.175)
  Bottom Layer w0.2: RN6.6@74.365,95.5 74.595,95.5 74.765,95.67 74.765,97.265 75.8,98.3 80.119,98.3 80.519,97.9 99.806,97.9 101.006,99.1 104.709,99.1 106.319,100.71 107.442,100.71 109.291,102.559 109.291,105.25 109.216,105.325 108.4,105.325 108.25,105.175 v1(108.194,105.175) ; v1(105.6,108) 105.6,107.892 105.95,107.542 105.95,107.105 106.15,106.905 U11.1@106.45,106.905 U11.1@106.75,106.905
NetRN6_7: RN6.7 U10.1 | length 51.4
  Top Layer w0.2: v1(74.979,93.23) 74.979,91.854 75.932,90.9 76.619,90.9 76.89,90.629 80.596,90.629 80.798,90.832 80.798,91.298 v1(80.875,91.375) ; v1(109.65,91.725) 109.95,91.425 117.145,91.425 119.125,93.405 U10.1@119.425,93.405
  Bottom Layer w0.2: RN6.7@73.94,94.625 74.171,94.625 74.585,94.211 74.964,94.211 75.175,94 75.175,93.834 75.052,93.711 75.052,93.352 74.925,93.225 74.974,93.225 v1(74.979,93.23) ; v1(80.875,91.375) 80.875,91.342 81.242,90.975 106.75,90.975 107.65,91.875 107.65,92.25 108.449,92.25 108.856,91.843 108.973,91.725 v1(109.65,91.725)
NetRN6_8: RN6.8 U9.1 | length 49
  Bottom Layer w0.2: RN6.8@73.94,93.725 74.027,93.725 74.339,93.413 74.339,92.957 74.666,92.63 75.227,92.63 75.579,92.981 75.579,95.083 76.991,96.495 77.245,96.495 77.35,96.6 101.464,96.6 102.409,97.545 104.286,97.545 106.651,99.91 107.774,99.91 110.755,102.891 110.755,104.58 113.03,106.855 U9.1@114.125,106.855
NetU13_2: U13.2 U14.5 | length 17.2
  Top Layer w0.2: v1(25.701,97.48) 25.891,97.67 26.6,97.67 U14.5@26.63,97.7 ; v1(29.5,110.175) 29.608,110.175 29.833,109.95 30.575,109.95 U13.2@30.675,109.85
  Bottom Layer w0.2: v1(25.701,97.48) 25.101,98.08 25.101,105.901 29.375,110.175 v1(29.5,110.175)
NetU13_3: U13.3 U14.4 | length 14.7
  Top Layer w0.2: v1(25.701,98.405) 25.906,98.2 U14.4@26.63,98.2 ; v1(29.5,109.275) 29.538,109.237 30.638,109.237 U13.3@30.675,109.2
  Bottom Layer w0.2: v1(25.701,98.405) 25.701,105.401 29.5,109.2 v1(29.5,109.275)
NetU14_25: U14.25 U15.35 | length 26.4
  Top Layer w0.2: U14.25@29.4,100.625 29.405,100.63 29.405,101.035 29.45,101.08 29.45,101.724 29.801,102.075 v1(30.725,102.075) ; v1(43.557,112.296) 44.655,111.199 44.655,111.12 45.175,110.6 U15.35@45.175,110.05
  Bottom Layer w0.2: v1(30.725,102.075) 32.85,104.2 32.85,110.815 34.332,112.296 v1(43.557,112.296)
NetU14_26: U14.26 U15.34 | length 29
  Top Layer w0.2: U14.26@28.875,100.57 28.875,102.047 29.15,102.322 29.15,102.425 29.7,102.975 29.7,103.774 29.876,103.95 30.95,103.95 32.3,105.3 32.3,109.7 35.7,113.1 37.93,113.1 38.047,112.983 v1(38.047,112.9) ; v1(44.302,113.281) 44.302,112.797 45.925,111.174 45.925,111.12 46.445,110.6 U15.34@46.445,110.05
  Bottom Layer w0.2: v1(38.047,112.9) 43.922,112.9 v1(44.302,113.281)
  other v1: 29.15,102.364
NetU15_4: U15.4
NetU15_5: U15.5
NetU15_6: U15.6
NetU15_7: U15.7
NetU15_8: U15.8
NetU15_9: U15.9
NetU15_17: U15.17
NetU15_18: U15.18
NetU15_19: U15.19
NetU15_20: U15.20
NetU15_21: U15.21
NetU15_22: U15.22
NetU15_37: U15.37
VBUS: C3.2 C4.2 D1.A U13.1 U14.7 U14.8 | length 52.4
  Top Layer w0.2: U14.7@26.63,96.7 26.92,96.7 26.95,96.67 26.95,95.997 27.147,95.8 27.47,95.8 27.5,95.83 ; U13.1@30.675,110.5 32.534,110.5 33.68,111.645 ; v1(33.2,112.1) 33.225,112.1 33.68,111.645 ; v1(49.4,105.8) 49.4,104.804 48.346,103.75 48.25,103.75 48.2,103.8 45.05,103.8 40.315,108.535 40.315,110.834 40.299,110.85 40.299,112.926 39.725,113.5 35.534,113.5 33.68,111.645
  Bottom Layer w0.2: C3.2@27.8,96.2 27.5,96.5 C4.2@27.5,98.5 27.5,99.8 26.325,100.975 26.325,105.415 28.368,107.458 28.532,107.458 31.575,110.501 31.575,110.675 31.875,110.975 31.875,111.725 32.2,112.05 33.15,112.05 v1(33.2,112.1) ; v1@49.35,105.95 49.4,105.9 v1(49.4,105.8) ; 49.5,106.125 50,106.625 50,107.235 50.265,107.5 D1.A@50.505,107.5
pads on no net: Q3.1 U1.6 U2.6 U3.1 U3.6 U4.6 U5.6 U6.6 U8.6 U9.6 U10.6 U11.6 U12.6 U13.4 U13.P$1 U13.P$2 U13.P$8 U13.P$9 U13.P$10 U13.P$11 U13.P$12 U13.P$13 U14.1 U14.2 U14.10 U14.12 U14.13 U14.14 U14.15 U14.16 U14.17 U14.18 U14.19 U14.20 U14.21 U14.22 U14.23 U14.27 U15.25 U15.32 U16.4 U?.6

## Text inside footprints (layer, text, board x,y; h text height)
U13: Mechanical 13 "PCB Edge" at 26.547,104.842 h0.25 r270
U15: Mechanical 13 "ANTENNA" at 37.325,95.55 h1.78 r90